# Altium PCB f1_hw_2.PcbDoc
Units mil, origin at the board's own origin, x right, y up, seen from the top; angles counter-clockwise.
Board outline 2015 x 735 mil, 2 copper layers (Top Layer, Bottom Layer); 22 components, 45 nets, 134 pads, 43 vias.
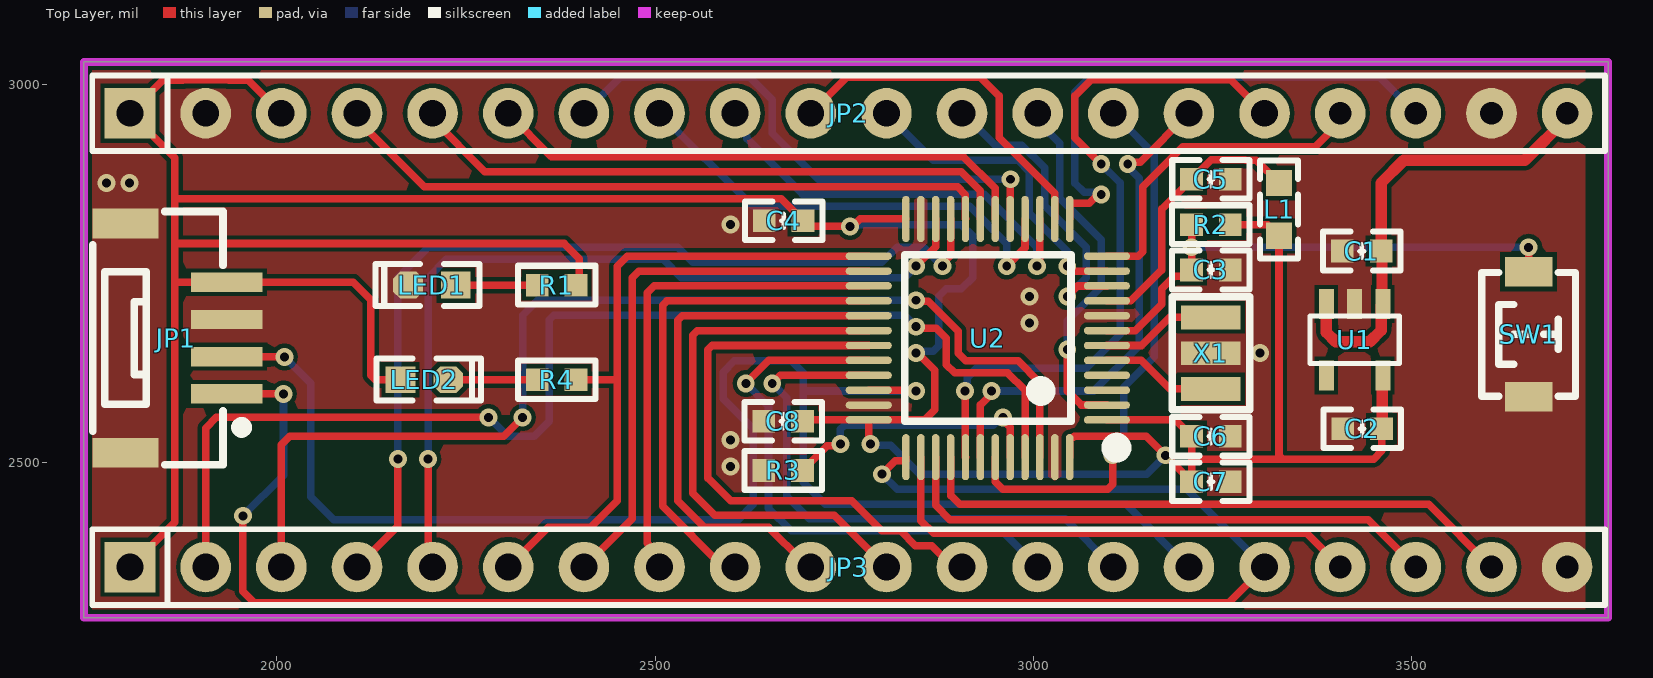
[diagram p0: Top Layer view]
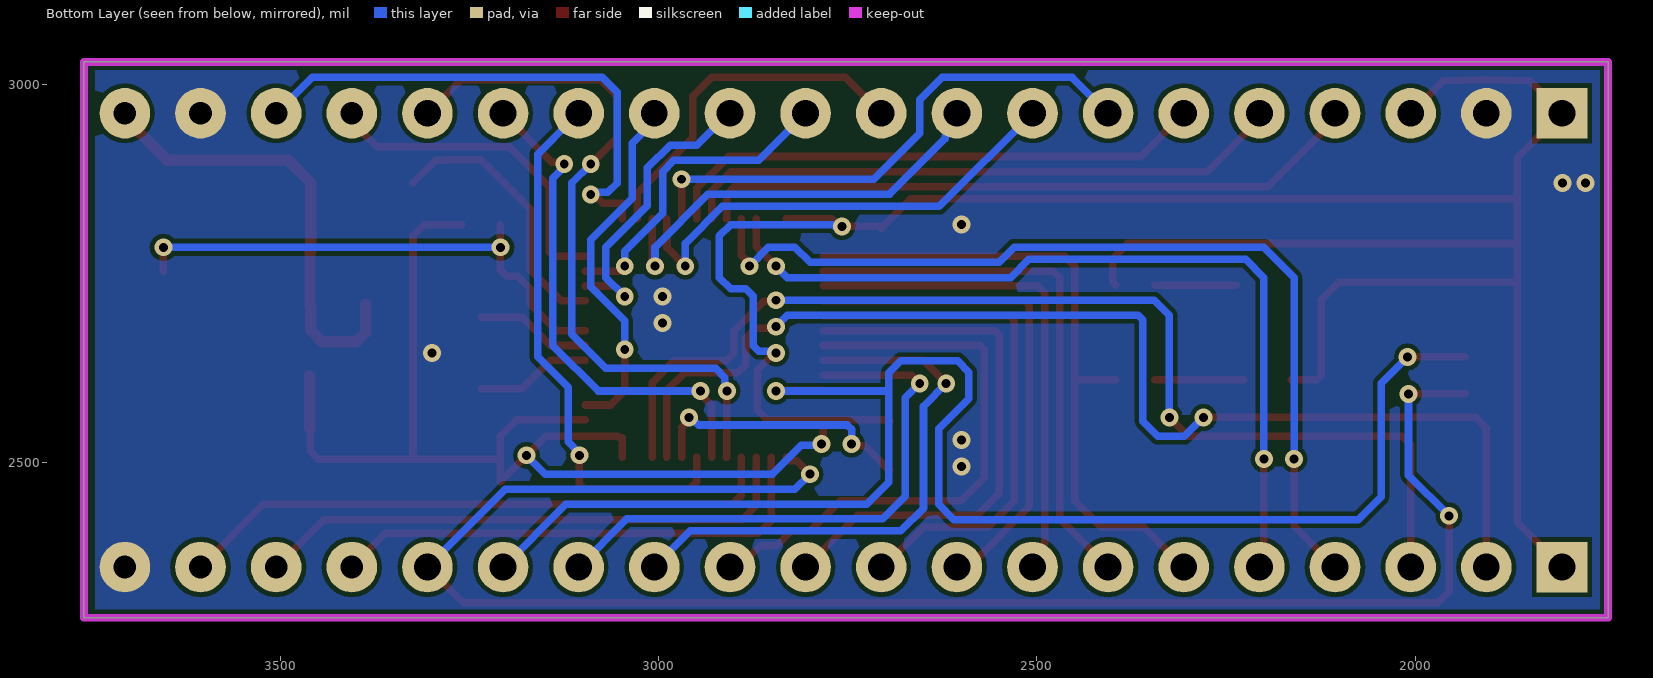
[diagram p1: Bottom Layer view, seen from below]

## Layer stack, top to bottom
Top Solder: solder mask 0.4, Solder Resist, Dk 3.5
Top Layer: signal copper 1.4
Dielectric 1: dielectric 12.6, FR-4, Dk 4.8
Bottom Layer: signal copper 1.4
Bottom Solder: solder mask 0.4, Solder Resist, Dk 3.5

## Board outline
1745,2295 1745,3030 3760,3030 3760,2295

## Design rules (kind name [scope] priority, off if disabled: settings)
Clearance [All] p1: gap=6 ignorepadtopadclearanceinfootprint=TRUE
PlaneConnect [All] p1: planeconnectstyle=Direct reliefexpansion=20 reliefentries=4 reliefconductorwidth=10 reliefairgap=10
PolygonConnect [All] p1: connectstyle=Direct reliefconductorwidth=10 reliefentries=4 polygonreliefangle="90 Angle" airgapwidth=10
RoutingVias [All] p1: holewidth=28 width=50 viastyle="Through Hole" minholewidth=28 minwidth=50 maxholewidth=28 maxwidth=50
SolderMaskExpansion [All] p1: expansion=4 istentingtop=FALSE
SupplyNets "Schematic Supply Nets_3" [InNet('3V3')] p1: voltage=0.000
SupplyNets "Schematic Supply Nets_2" [InNet('3V3VDDA')] p2: voltage=0.000
SupplyNets "Schematic Supply Nets_1" [InNet('5V')] p3: voltage=0.000
SupplyNets "Schematic Supply Nets" [InNet('VSS')] p4: voltage=0.000
Width [All] p1: maxlimit=100 minlimit=10 preferedwidth=10 minimp=50.000000 maximp=50.000000 favimp=50.000000
29 further rules are at their usual default settings.

## Components (designator, comment, footprint, x,y, rotation, side; value= is the part's Value field where it differs from the comment)
C1 "1uF" "C 0603_L" 3434.41,2780 r180 top
C2 "100nF" "C 0603_L" 3435,2545 r180 top
C3 "100nF/50V" "C 0603_L" 3235,2755 r0 top
C4 "100nF/50V" "C 0603_L" 2670,2820 r0 top
C5 "100nF/50V" "C 0603_L" 3235,2875 r180 top
C6 "100nF/50V" "C 0603_L" 3235,2535 r180 top
C7 "100nF/50V" "C 0603_L" 3235,2475 r180 top
C8 "100nF/50V" "C 0603_L" 2669.41,2555 r0 top
JP1 "HDR-1X4" "GH 1.25-LS-4P" 1855,2665 r90 top
JP2 "HDR-1X20" HDR2.54-LI-20P 2755.91,2962.2 r0 top locked
JP3 "HDR-1X20" HDR2.54-LI-20P 2755.91,2362.2 r0 top
L1 "0Ω" "L 0603" 3325,2835 r270 top
LED1 "Colour" "LED 0603R" 2205,2735 r180 top
LED2 "Colour" "LED 0603R" 2195,2610 r0 top
R1 "2K" "R 0603_L" 2370,2735 r180 top
R2 "10k" "R 0603_L" 3235,2815 r0 top
R3 "10k" "R 0603_L" 2669.41,2490 r180 top
R4 "2K" "R 0603_L" 2370,2610 r180 top
SW1 "3.2x4.2x2.5" "TSW SMD-3*4*2" 3655,2670 r90 top
U1 "RT9013-33GB" SOT23-5 3462.4,2710 r180 top
U2 "STM32F103C8T6" "LQFP48 7X7_L" 2940,2665 r90 top locked
X1 "8M" "OSC 3213-3P" 3235,2645 r270 top

## Footprints (in the part's own frame and the unit in brackets; to place one, negate y for a bottom-side part, rotate by r counter-clockwise, add the part's x,y. Pads: shape width x height; smd on the part's side, far side on the other; paste and mask are expansions set on the pad)
"C 0603_L" [mil] "无极性贴片电容"
  rect 30x30 smd: 1(-25.59,0) 2(25.59,0)
  silkscreen extent -51,-26 51,26, body extent -31,-16 31,16, height 32
"GH 1.25-LS-4P" [mm] "长：8.25mm，宽：4.95mm，高：4.1mm"
  rect 1x2.2 smd: 0(-3.85,1.4) 100(3.85,1.4)
  rect 0.65x2.4 smd: 1(-1.875,-2) 2(-0.625,-2) 3(0.625,-2) 4(1.875,-2)
  silkscreen extent -4.25,-2.6 4.25,2.5, body extent -4.13,-2.45 4.12,2.5, height 4.2
HDR2.54-LI-20P [mm] "排针，20脚"
  rect 1.7x1.7 hole 0.9: 1(-24.13,0)
  round 1.7 hole 0.9: 2(-21.59,0) 3(-19.05,0) 4(-16.51,0) 5(-13.97,0) 6(-11.43,0) 7(-8.89,0) 8(-6.35,0) 9(-3.81,0) 10(-1.27,0) 11(1.27,0) 12(3.81,0) 13(6.35,0) 14(8.89,0) 15(11.43,0) 16(13.97,0)
  round 1.7 hole 0.762: 17(16.51,0) 18(19.05,0) 19(21.59,0) 20(24.13,0)
  silkscreen extent -25.4,-1.27 25.4,1.27, body extent -25.4,-1.27 25.4,1.27, height 8.5
"L 0603" [mil] "小功率贴片电感"
  rect 35x35 smd: 1(-35,0) 2(35,0)
  silkscreen extent -65,-25 65,25, body extent -31,-16 31,16, height 31
"LED 0603R" [mm] "红色0603LED"
  rect 1x0.9 smd: 1(-0.8,0)
  oct 1x0.9 smd: 2(0.8,0)
  silkscreen extent -1.6,-0.7 1.9,0.7, body extent -0.8,-0.4 0.8,0.4, height 0.47
"LQFP48 7X7_L" [mm] "48脚，体宽7x7mm，脚距0.5mm"
  oval 0.25x1.55 smd: 1(-2.75,-4) 2(-2.25,-4) 3(-1.75,-4) 4(-1.25,-4) 5(-0.75,-4) 6(-0.25,-4) 7(0.25,-4) 8(0.75,-4) 9(1.25,-4) 10(1.75,-4) 11(2.25,-4) 12(2.75,-4) 25(2.75,4) 26(2.25,4) 27(1.75,4) 28(1.25,4) 29(0.75,4) 30(0.25,4) 31(-0.25,4) 32(-0.75,4) 33(-1.25,4) 34(-1.75,4) 35(-2.25,4) 36(-2.75,4)
  oval 1.55x0.25 smd: 13(4,-2.75) 14(4,-2.25) 15(4,-1.75) 16(4,-1.25) 17(4,-0.75) 18(4,-0.25) 19(4,0.25) 20(4,0.75) 21(4,1.25) 22(4,1.75) 23(4,2.25) 24(4,2.75) 37(-4,2.75) 38(-4,2.25) 39(-4,1.75) 40(-4,1.25) 41(-4,0.75) 42(-4,0.25) 43(-4,-0.25) 44(-4,-0.75) 45(-4,-1.25) 46(-4,-1.75) 47(-4,-2.25) 48(-4,-2.75)
  silkscreen extent -3.93,-4.57 2.79,2.79, body extent -4.5,-4.5 4.5,4.5, height 1.45
"OSC 3213-3P" [mm] "内置电容晶振"
  rect 0.8x2 smd: 1(-1.2,0) 2(1.2,0) 3(0,0)
  silkscreen extent -1.9,-1.3 1.9,1.3, body extent -1.6,-0.65 1.6,0.65, height 1.02
"R 0603_L" [mil] "1/10W贴片电阻"
  rect 30x30 smd: 1(-25.59,0) 2(25.59,0)
  silkscreen extent -51,-26 51,26, body extent -31,-16 32,16, height 16
SOT23-5 [mm]
  rect 0.5x1 smd: 1(0,0) 2(0.95,0) 3(1.9,0) 4(1.9,2.4) 5(0,2.4)
  silkscreen extent -0.55,0.4 2.45,2, body extent -0.5,-0.2 2.4,2.6, height 1.09
"TSW SMD-3*4*2" [mm] "3*4*2mm"
  rect 1x1.6 smd: 1(-2.1,0) 2(2.1,0)
  silkscreen extent -2.08,-1.58 2.08,1.58, body extent -2.45,-1.45 2.45,1.45, height 2

## Part data
C1 C2: library part C, "无极性贴片电容", BOM名称=无极性贴片电容, 学习资源=www.ooocke.com, 版权归属=源创客
C3 C4 C5 C6 C7 C8: library part 无极贴片电容, "贴片电容"
JP1: library part "Header 4", "4P接插件", BOM名称=4P接插件, 学习资源=www.ooocke.com, 版权归属=源创客
JP2 JP3: library part "Header 20", "20P接插件", BOM名称=20P接插件, 学习资源=www.ooocke.com, 版权归属=源创客
L1: library part 磁珠, "小功率贴片电感"
LED1 LED2: library part LED-SMD, "贴片LED", BOM名称=贴片LED, 学习资源=www.ooocke.com, 版权归属=源创客
R1 R2 R3 R4: library part 电阻, "贴片电阻1%精度"
SW1: library part "TSW SMD-3x4_D", "3.2x4.2轻触开关", BOM名称=3x6轻触开关, 学习资源=www.ooocke.com, 版权归属=源创客
U1: library part RT9193-33GB
U2: "STM32F103C8T6是一款由意法半导体公司（ST）推出的基于Cortex-M3内核的32位微控制器，硬件采用LQFP48封装，属于ST公司微控制器中的STM32系列。"
X1: library part XTAL-3P, "3脚内置电容无源晶振"

## Via types
v1: diameter 23.62, hole 11.81, Top Layer to Bottom Layer, 43 vias

## Nets (pads, with @x,y where several pads share a name; then routed paths per layer and width w, separated by ;. In a path a pad name is that pad's centre, name@x,y a point inside that pad or via, vN(x,y) a via of type N, cw(c..) or ccw(c..) an arc to the next point about the centre after c; other vN are vias at no path point)
3V3: C2.1 C4.2 C6.2 C7.2 C8.2 JP1.4 JP2.1 JP2.3 JP3.1 L1.2 LED2.1 R1.1 R2.2 U1.5 U2.1 U2.24 U2.36 U2.48 | length 5079.1
  Top Layer w10: JP3.1 1865,2421.3 1865,2740 ; JP2.3 1966.04,3002.07 1963.11,3005 1907.34,3006.65 ccw(c1905.91,2962.2) 1904.46,3006.65 1848.7,3005 JP2.1 1865,2903.11 1865,2849 ; LED2.1 2130,2610 2124.14,2615.86 2124.14,2715.86 2101.18,2738.82 JP1.4 1866.18,2738.82 1865,2740 ; R1.1 2400,2739.41 2400,2770 2380,2790 1865,2790 ; C8.2 2696.73,2556.73 U2.36 ; v1(2785,2525) 2782.54,2527.46 U2.36 ; U2.24 2771.15,2822.46 2761.29,2812.61 2705.59,2812.61 2705.59,2810 2666.58,2849 1865,2849 ; v1(2845,2645) 2847.37,2645 2870,2622.37 2870,2570 2856.73,2556.73 U2.36 ; U2.48 3048.27,2532.97 3048.35,2533.05 3052.17,2533.05 3054.13,2535 3149.42,2535 C7.2 3209.41,2505 ; U2.1 3187.68,2556.73 C6.2 3209.41,2505 ; R2.2 3310,2815 L1.2 3325,2509.71 3329.71,2505 ; C2.1 3460.86,2544.74 3460.86,2515.86 3450,2505 3329.71,2505 ; 1865,2740 1865,2790 ; 1865,2790 1865,2849 ; 3209.41,2505 3329.71,2505
  Top Layer w15: C2.1 3461.5,2545.91 3461.5,2614.61 U1.5
  Bottom Layer w10: v1(2757.61,2812.61) 2767.64,2812.61 2770.03,2815 2905,2815 2920,2800 2920,2745 2905,2730 2885,2730 2875,2720 2875,2655 2867.61,2647.61 2847.61,2647.61 v1(2845,2645) ; v1(2785,2525) 2786.81,2523.19 2811.81,2523.19 2850,2485 3150,2485 v1(3175,2510)
3V3VDDA: C5.2 L1.1 U2.9 | length 365
  Top Layer w10: U2.9 3129.21,2714.21 3170,2755 3170,2835.59 3235.41,2901 3280.15,2901 3281.15,2900 3295,2900 L1.1
5V: C1.1 JP2.20 U1.1 U1.3 | length 606.1
  Top Layer w15: U1.3 3387.6,2672.4 3400,2660 3445,2660 3460.06,2675.06 3460.06,2707.66 U1.1 3461.2,2711.2 3461.2,2778.8 C1.1 3460,2870 3490,2900 3650,2900 3705.91,2955.91 JP2.20
A00_P10: JP2.12 U2.10 | length 388.3
  Top Layer w10: v1(3045,2720) 3058.82,2733.82 3097.39,2733.82 U2.10
  Bottom Layer w10: JP2.12@2915,2955 2950,2920 2985,2920 3015,2890 3015,2840 3070,2785 3070,2745 v1(3045,2720)
A01_P11: JP2.11 U2.11 | length 421.9
  Top Layer w10: v1(3045,2760) 3051.42,2753.58 U2.11
  Bottom Layer w10: JP2.11 2868.11,2900 2980,2900 2995,2885 2995,2830 3045,2780 v1(3045,2760)
A02_P12: JP2.17 U2.12 | length 443.6
  Top Layer w10: U2.12 3139.14,2773.27 3145,2779.13 3145,2865 3197.74,2917.74 3372.74,2917.74 3405.91,2950.91 JP2.17
A03_P13: JP2.18 U2.13 | length 707.4
  Top Layer w10: U2.13 3048.27,2842.98 3048.35,2843.06 3074.37,2843.06 3086.31,2855 v1(3090,2855)
  Bottom Layer w10: v1(3090,2855) 3087.39,2857.61 3067.39,2857.61 3055,2870 3055,2990 3075,3010 3458.11,3010 JP2.18
A04_P14: JP2.10 U2.14 | length 472.3
  Top Layer w10: JP2.10 2753.7,3010 2930,3010 2955,2985 2955,2930 3028.5,2856.5 3028.5,2822.54 U2.14
A05_P15: JP2.9 U2.15 | length 572.2
  Top Layer w10: v1(3005,2760) 3005,2763.69 3008.9,2767.58 U2.15
  Bottom Layer w10: JP2.9 2605.91,2946.8 2621.12,2931.59 2621.12,2928.88 2695,2855 2935,2855 3005,2785 v1(3005,2760)
A06_P16: JP2.8 U2.16 | length 632.9
  Top Layer w10: v1(2965,2760) 2989.13,2784.13 2989.13,2796.95 2989.21,2797.03 U2.16
  Bottom Layer w10: JP2.8 2629.11,2839 2916,2839 2965,2790 v1(2965,2760)
A07_P17: JP2.7 U2.17 | length 718.5
  Top Layer w10: U2.17 2969.61,2822.54 2969.61,2874.61 v1(2970,2875)
  Bottom Layer w10: JP2.7 2453.7,3010 2625,3010 2655,2980 2655,2935.74 2715.74,2875 v1(2970,2875)
A08_P29: JP3.10 U2.29 | length 699.9
  Top Layer w10: JP3.10@2695,2370 2650,2415 2565,2415 2530,2450 2530,2688.67 2535.86,2694.53 U2.29 ; JP3.10@2697.8,2362.2 JP3.10
A09_P30: JP3.11 U2.30 | length 740.4
  Top Layer w10: U2.30 2555.86,2674.84 2550,2668.98 2550,2460 2579,2431 2737.11,2431 JP3.11
A10_P31: JP3.12 U2.31 | length 769
  Top Layer w10: U2.31 2575.86,2655.16 2570,2649.3 2570,2480 2600,2450 2760,2450 2800,2410 2825,2410 2844.33,2390.67 2865.83,2390.67 2894.3,2362.2 JP3.12
A11_P32: JP3.13 U2.32 | length 740.7
  Top Layer w10: v1(2620,2605) 2650.47,2635.47 U2.32
  Bottom Layer w10: v1(2620,2605) 2650,2575 2650,2440 2680,2410 2958.11,2410 JP3.13
A12_P33: JP3.14 U2.33 | length 759.6
  Top Layer w10: v1(2655,2605) 2665.79,2615.79 U2.33
  Bottom Layer w10: v1(2655,2605) 2674,2586 2674,2456 2704,2426 3042.11,2426 JP3.14
A13_P34: JP1.2 JP3.15 U2.34 | length 2105.3
  Top Layer w10: JP1.2 1933.94,2640.2 2009.8,2640.2 v1(2010,2640) ; U2.34 2782.61,2596.02 2843.98,2596.02 v1(2845,2595)
  Bottom Layer w10: v1(2010,2640) 2045,2605 2045,2455 2075,2425 2610,2425 2630,2445 2630,2545 2590,2585 2590,2620 2605,2635 2680,2635 2695.86,2619.14 2695.86,2595 ; v1(2845,2595) 2695.86,2595 ; JP3.15 3123.11,2445 2725,2445 2695.86,2474.14 2695.86,2595
A14_P37: JP1.1 JP3.16 U2.37 | length 2337.6
  Top Layer w10: JP1.1 v1(2008.82,2591.18) v1@2010,2590 ; v1(1955,2430) 1955,2330 1970,2315 3258.7,2315 JP3.16 ; v1(2800,2485) 2817.59,2502.59 2831.65,2502.59 2831.73,2502.67 U2.37
  Bottom Layer w10: v1(1955,2430) 2008.82,2483.82 v1(2008.82,2591.18) ; v1(2800,2485) 2820,2465 3203.11,2465 JP3.16
A15_P38: JP3.17 U2.38 | length 663.9
  Top Layer w10: U2.38 2851.42,2423.58 2868.33,2406.67 3361.44,2406.67 JP3.17
B00_P18: JP2.6 U2.18 | length 725.5
  Top Layer w10: JP2.6 2363.11,2905 2907.74,2905 2949.84,2862.9 U2.18
B01_P19: JP2.5 U2.19 | length 808.8
  Top Layer w10: JP2.5 2205.91,2954.09 2275,2885 2905,2885 2930.08,2859.92 2930.08,2822.54 U2.19
B02_P20: JP2.4 U2.20 | length 886
  Top Layer w10: JP2.4 2105.91,2954.09 2195,2865 2900,2865 2910.39,2854.61 2910.39,2822.54 U2.20
B03_P39: JP3.18 U2.39 | length 732.3
  Top Layer w10: U2.39 2871.1,2443.9 2890,2425 3443.11,2425 JP3.18
B04_P40: JP3.19 U2.40 | length 805
  Top Layer w10: U2.40 2890.79,2456.84 2902.63,2445 3523.11,2445 JP3.19
B05_P41: JP2.16 U2.41 | length 950.7
  Top Layer w10: v1(2910,2595) 2910.39,2594.61 2910.39,2507.61 U2.41 ; v1(3090,2895) 3055,2930 3055,2985 3076.67,3006.67 3261.44,3006.67 JP2.16
  Bottom Layer w10: v1(2910,2595) 2912.61,2597.61 2912.61,2612.62 2924.99,2625 3070,2625 3115,2670 3115,2870 v1(3090,2895)
B06_P42: JP2.15 U2.42 | length 668.4
  Top Layer w10: U2.42 2930.16,2576.47 2945,2591.31 v1(2945,2595) ; v1(3125,2895) 3127.61,2897.61 3141.31,2897.61 JP2.15
  Bottom Layer w10: v1(2945,2595) 3080,2595 3140,2655 3140,2876.31 3125,2891.31 v1(3125,2895)
B07_P43: JP2.14 U2.43 | length 730.4
  Top Layer w10: U2.43 2949.92,2507.46 2949.92,2475.08 2960,2465 3098.55,2465 3105,2471.45 v1(3105,2510)
  Bottom Layer w10: v1(3105,2510) 3105,2512.67 3120,2527.67 3120,2600 3160,2640 3160,2908.11 3116.8,2951.31 JP2.14
B08_P45: JP3.2 U2.45 | length 1577.9
  Top Layer w10: JP3.2 1905.91,2545.91 1920,2560 v1(2280,2560) ; v1(2845,2680) 2846.81,2678.19 2871.81,2678.19 2885,2665 2885,2630 2896,2619 2966,2619 2989.21,2595.79 U2.45
  Bottom Layer w10: v1(2280,2560) 2305,2535 2340,2535 2360,2555 2360,2689.14 2365.86,2695 2830,2695 v1(2845,2680)
B09_P46: JP3.3 U2.46 | length 1483.7
  Top Layer w10: JP3.3 2005.91,2524.14 2016.76,2535 2300,2535 v1(2325,2560) ; v1(2845,2715) 2846.46,2713.54 2861.46,2713.54 2901,2674 2901,2645 2911,2635 2980,2635 3008.9,2606.1 U2.46
  Bottom Layer w10: v1(2325,2560) 2325,2695 2345,2715 v1(2845,2715)
B10_P21: JP3.4 U2.21 | length 1235.6
  Top Layer w10: JP3.4 2160,2416.3 v1(2160,2505) ; v1(2880,2760) 2880,2763.69 2890.79,2774.47 U2.21
  Bottom Layer w10: v1(2160,2505) 2160,2745 2200,2785 2530,2785 2550,2765 2800,2765 2820,2785 2855,2785 v1(2880,2760)
B11_P22: JP3.5 U2.22 | length 1129.7
  Top Layer w10: v1(2200,2505) 2200,2368.11 JP3.5 ; v1(2845,2760) 2871.02,2786.02 2871.02,2822.39 U2.22
  Bottom Layer w10: v1(2200,2505) v1(2200,2505) 2199.95,2744.95 2224,2769 2511,2769 2535,2745 2830,2745 v1(2845,2760)
B12_P25: JP3.6 R4.1 U2.25 | length 882.9
  Top Layer w10: JP3.6 2358.7,2415 2415,2415 2450,2450 2450,2610 ; R4.1 2450,2610 ; U2.25 2463.27,2773.27 2450,2760 2450,2610
B13_P26: JP3.7 U2.26 | length 725.4
  Top Layer w10: JP3.7 2470,2426.3 2470,2745 2478.58,2753.58 U2.26
B14_P27: JP3.8 U2.27 | length 665.6
  Top Layer w10: JP3.8 2505.91,2377.61 2490,2393.52 2490,2725 2498.9,2733.9 U2.27
B15_P28: JP3.9 U2.28 | length 669.9
  Top Layer w10: JP3.9 2590.5,2362.2 2510,2442.71 2510,2708.35 2515.86,2714.21 U2.28
BOOT0: R3.1 U2.44 | length 361.6
  Top Layer w10: R3.1 2727.39,2522.39 2742.39,2522.39 v1(2745,2525) ; v1(2960,2560) 2960,2556.31 2969.45,2546.86 2969.45,2507.61 U2.44
  Bottom Layer w10: v1(2745,2525) 2745,2544.14 2750.86,2550 2947.33,2550 2957.33,2560 v1(2960,2560)
C13_P02: JP2.13 U2.2 | length 480.8
  Top Layer w10: v1(3045,2650) 3045,2595 3063.5,2576.5 3097.39,2576.5 U2.2
  Bottom Layer w10: JP2.13 3005.91,2951.85 3035,2922.76 3035,2850 3090,2795 3090,2732.74 3045,2687.74 v1(3045,2650)
NetLED1_1: LED1.1 R1.2 | length 107.9
  Top Layer w10: LED1.1 R1.2
NetLED2_2: LED2.2 R4.2 | length 117.9
  Top Layer w10: LED2.2 R4.2
NRST: C3.1 R2.1 SW1.2 U2.7 | length 694.8
  Top Layer w10: U2.7 3097.54,2674.92 3134.92,2674.92 3170,2710 3170,2730 3186.59,2746.59 3201,2746.59 C3.1 v1(3209.41,2785) R2.1 ; SW1.2 v1(3655,2785)
  Bottom Layer w10: v1(3209.41,2785) v1(3655,2785)
OSC32_IN: U2.3
OSC32_OUT: U2.4
OSC_IN: U2.5 X1.2 | length 153.2
  Top Layer w10: U2.5 3097.54,2635.4 3142.98,2635.4 3180.62,2597.75 X1.2
OSC_OUT: U2.6 X1.1 | length 152.9
  Top Layer w10: U2.6 3143.22,2655.16 3180.31,2692.24 X1.1
VSS: C1.2 C2.2 C3.2 C4.1 C5.1 C6.1 C7.1 C8.1 JP1.0 JP1.3 JP1.100 JP2.2 JP2.19 JP3.20 LED1.2 R3.2 SW1.1 U1.2 U2.8 U2.23 U2.35 U2.47 X1.3
  other v1: 2600,2495 2600,2530 3300,2645 2995,2685 2995,2720 2600,2815 1775,2870 1805,2870
pads on no net: U1.4

## Polygon pours and split planes (outlines as drawn)
VSS on Bottom Layer "VSS_L02_P001" (solid, remove dead copper, pour order 1): 1745,2300 1745,3025 3745,3025 3745,2300
VSS on Top Layer "VSS_L01_P000" (solid, remove dead copper, pour order 0): 1745,2300 1745,3025 3730,3025 3730,2300

## Keep-outs
Keep-Out Layer:
  the board outline again, w10